# Altium PCB board.PcbDoc
Units mm, origin at the board's own origin, x right, y up, seen from the top; angles counter-clockwise.
Board outline 14 x 33 mm, 4 copper layers (Top, Ground Plane, Power Plane, Bottom), stack 0.651 mm thick; 33 components, 30 nets, 186 pads, 77 vias.
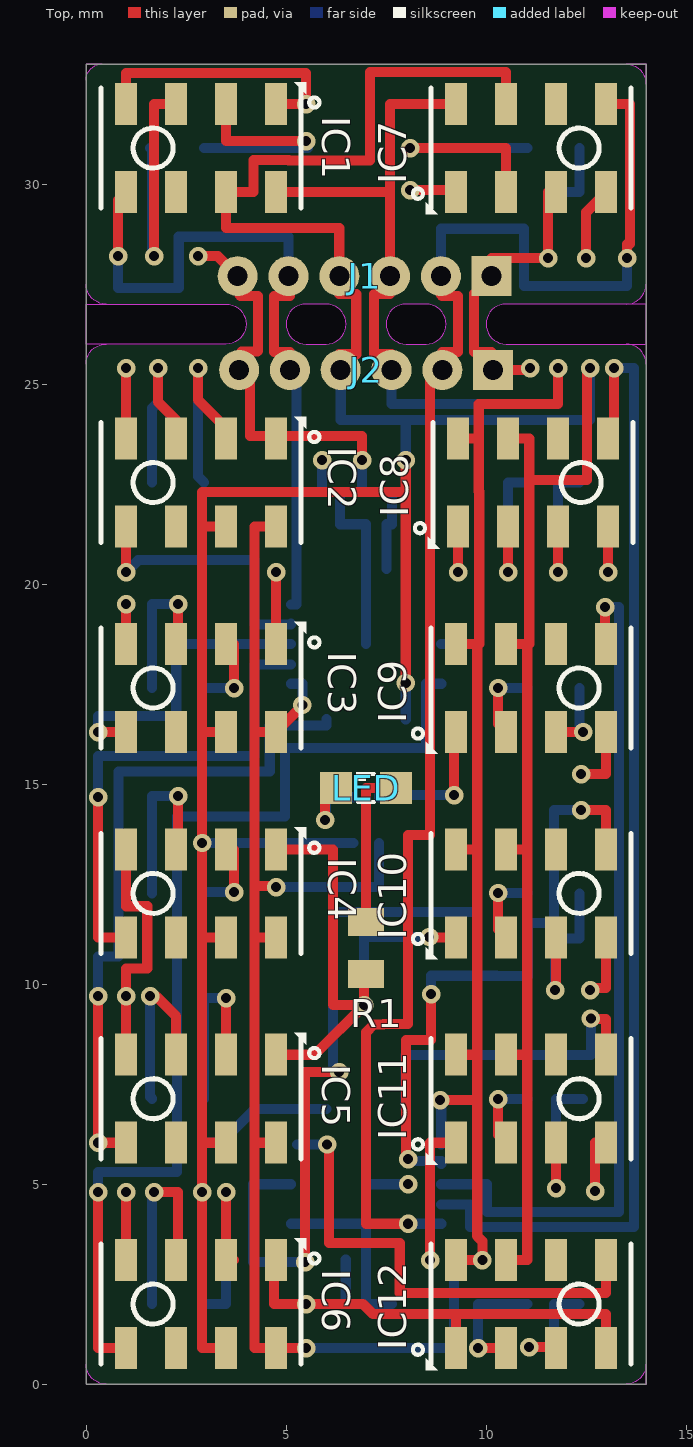
[diagram p0: Top view]
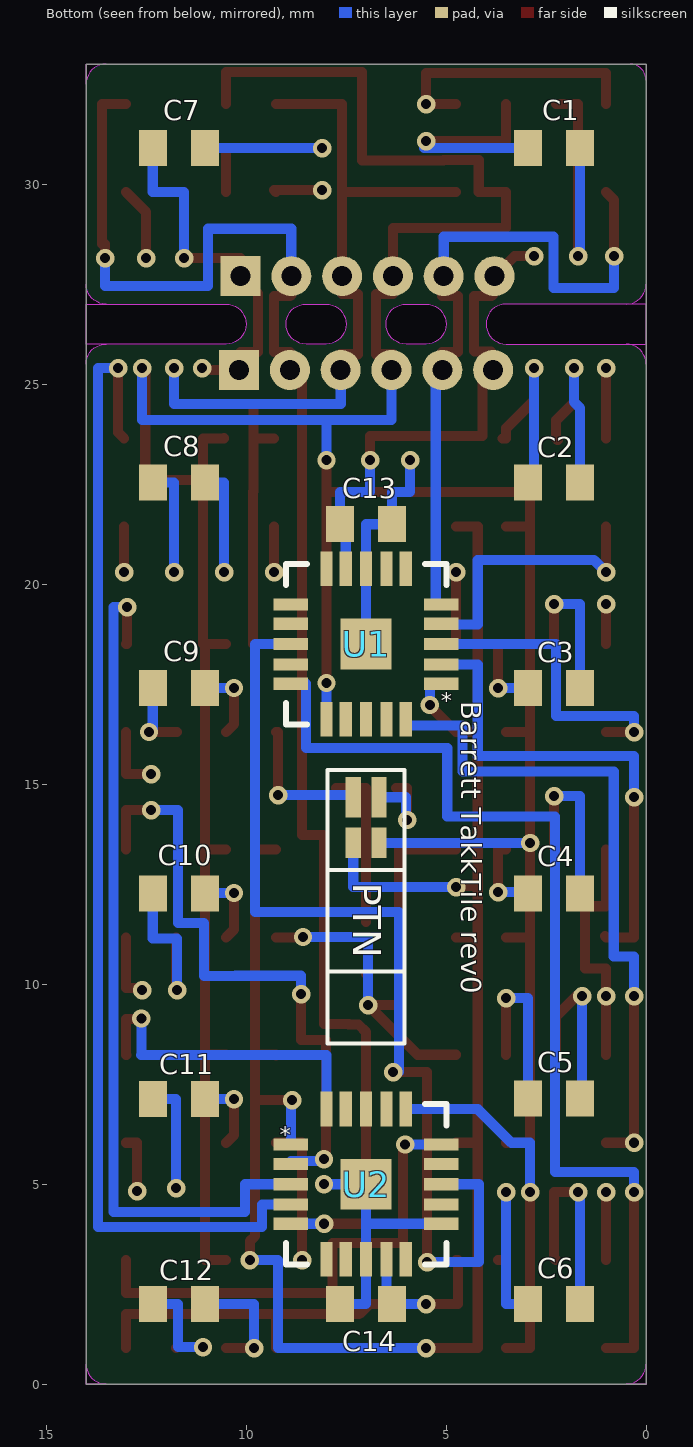
[diagram p1: Bottom view, seen from below]
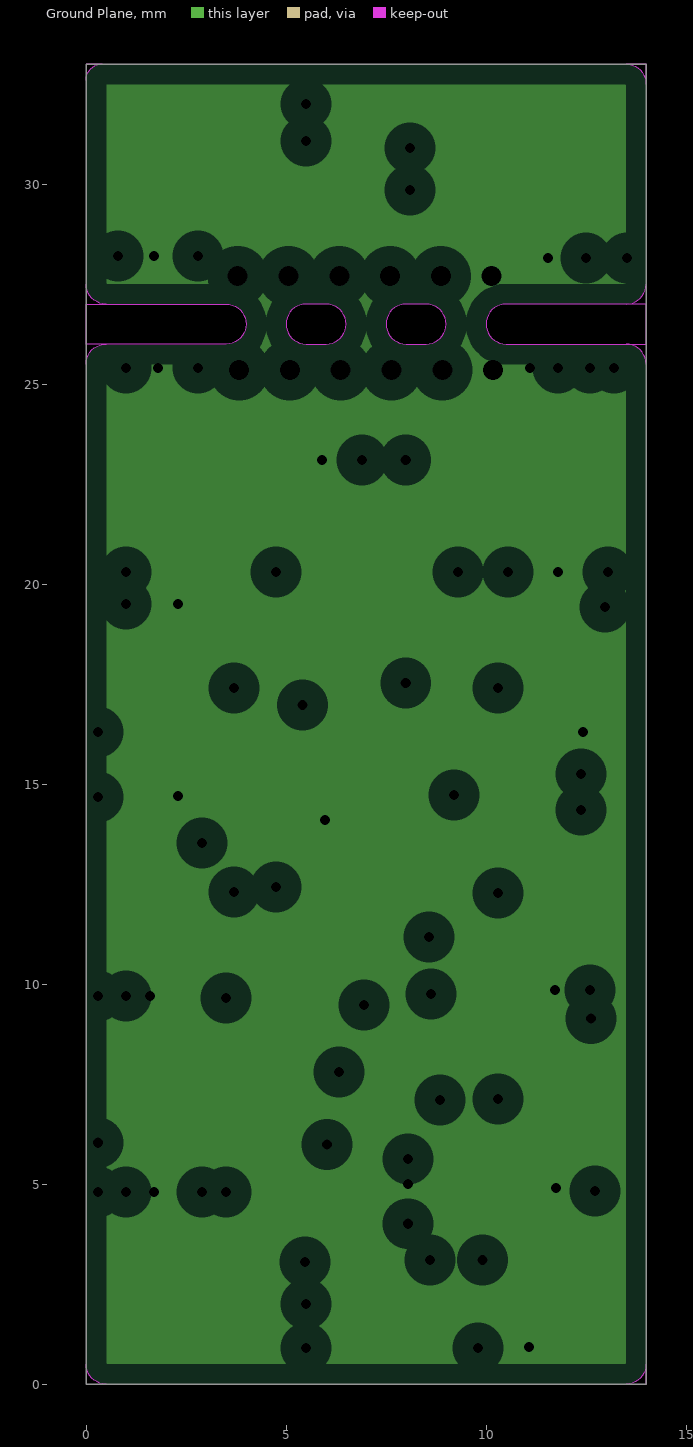
[diagram p2: Ground Plane, clearances drawn from the general rule]
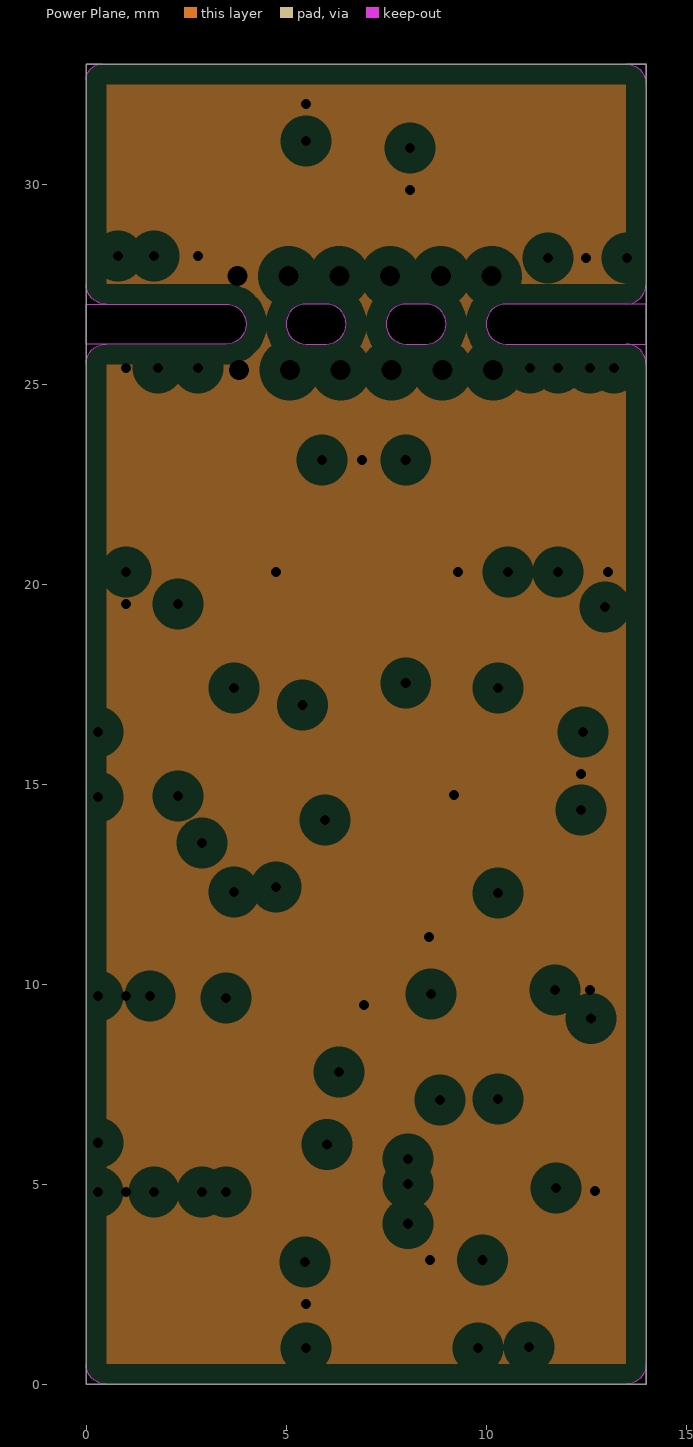
[diagram p3: Power Plane, clearances drawn from the general rule]

## Layer stack, top to bottom
Top Solder: solder mask 0.0102, Solder Resist, Dk 3.5
Top: signal copper 0.0356
Dielectric 1: prepreg 0.127, FR-4, Dk 4.2
Ground Plane: plane copper 0.036, net GND
Dielectric 3: core 0.254, Dk 4.2
Power Plane: plane copper 0.036, net VCC
Dielectric 4: prepreg 0.127, Dk 4.2
Bottom: signal copper 0.0356
Bottom Solder: solder mask 0.0102, Solder Resist, Dk 3.5

## Board outline
0,0 0,33 14,33 14,0
cut-out: 14,27 10.5,27 ccw(c10.5,26.5) 10,26.5 ccw(c10.5,26.5) 10.5,26 14,26
cut-out: 0,27 3.5,27 cw(c3.5,26.5) 4,26.5 cw(c3.5,26.5) 3.5,26 0,26
cut-out: 8,27 ccw(c8,26.5) 7.5,26.5 ccw(c8,26.5) 8,26 8.5,26 ccw(c8.5,26.5) 9,26.5 ccw(c8.5,26.5) 8.5,27
cut-out: 5.5,27 ccw(c5.5,26.5) 5,26.5 ccw(c5.5,26.5) 5.5,26 6,26 ccw(c6,26.5) 6.5,26.5 ccw(c6,26.5) 6,27
cut-out: 0,0 0.5,0 cw(c0.5,0.5) 0,0.5
cut-out: 14,0 14,0.5 cw(c13.5,0.5) 13.5,0
cut-out: 14,25.5 ccw(c13.5,25.5) 13.5,26 14,26
cut-out: 13.5,27 ccw(c13.5,27.5) 14,27.5 14,27
cut-out: 13.5,33 cw(c13.5,32.5) 14,32.5 14,33
cut-out: 0,33 0,32.6 cw(c0.4,32.6) 0.4,33
cut-out: 0,27 0.5,27 cw(c0.5,27.5) 0,27.5
cut-out: 0,25.5 cw(c0.5,25.5) 0.5,26 0,26

## Design rules (kind name [scope] priority, off if disabled: settings)
Clearance 0.127 [All] p1: gap=0.127 except(0: SMDPad-SMDPad SMDPad-THPad SMDPad-Via)
Clearance "Clearance (Same Net)" [All] p2: gap=0 except(0.127: SMDPad-SMDPad SMDPad-THPad; 0.152: SMDPad-Via)
ComponentClearance [All] p1: gap=0.127 collisioncheckmode=3 verticalgap=0.127 showdistances=FALSE
HoleSize [All] p1: absolutevalues=TRUE maxlimit=2.54 minlimit=0.254 maxpercent=80.000 minpercent=20.000
HoleToHoleClearance mdViaViaSameLayer [All] p1: gap=0.203 allowstackedmicrovias=TRUE
HoleToHoleClearance [All] p2: gap=0.254 allowstackedmicrovias=TRUE
MinimumSolderMaskSliver [All] p1: minsoldermaskwidth=0.025
PasteMaskExpansion mlMinCreamFrame [All] p1: expansion=0
PasteMaskExpansion [All] p2: expansion=0
PlaneClearance [All] p1: clearance=0.508
PlaneConnect [All] p1: planeconnectstyle=Direct reliefexpansion=0.508 reliefentries=4 reliefconductorwidth=0.254 reliefairgap=0.254
PolygonConnect ThermalVias [IsVia] p1: connectstyle=Direct reliefconductorwidth=0.254 reliefentries=4 polygonreliefangle="90 Angle" airgapwidth=0.254
PolygonConnect [All] p2: connectstyle=Relief reliefconductorwidth=0.254 reliefentries=4 polygonreliefangle="90 Angle" airgapwidth=0.254
RoutingVias [All] p1: holewidth=0.711 width=1.27 viastyle="Through Hole" minholewidth=0.254 minwidth=0.457 maxholewidth=0.711 maxwidth=1.27
SilkToSilkClearance [All] p1 off: silktosilkclearance=0.254
SilkToSolderMaskClearance [IsPad] p1 off: minsilkscreentomaskgap=0.254 clearancetoexposedcopper=TRUE
SolderMaskExpansion mlMinStopFrame [All] p1: expansion=0.051
SolderMaskExpansion [All] p2: expansion=0.102
Width Width_1 [All] p1: maxlimit=2540 minlimit=0.127 preferedwidth=0.254
Width [All] p2: maxlimit=0.254 minlimit=0.254 preferedwidth=0.254
21 further rules are at their usual default settings.

## Components (designator, comment, footprint, x,y, rotation, side; value= is the part's Value field where it differs from the comment)
C1 "1uF" C0402 2.3,30.9 r180 bottom
C2 "1uF" C0402 2.3,22.539 r180 bottom
C3 "1uF" C0402 2.3,17.404 r180 bottom
C4 "1uF" C0402 2.3,12.269 r180 bottom
C5 "1uF" C0402 2.3,7.135 r180 bottom
C6 "1uF" C0402 2.3,2 r180 bottom
C7 "1uF" C0402 11.683,30.9 r0 bottom
C8 "1uF" C0402 11.683,22.539 r0 bottom
C9 "1uF" C0402 11.683,17.404 r0 bottom
C10 "1uF" C0402 11.683,12.269 r0 bottom
C11 "1uF" C0402NOMECH 11.683,7.127 r0 bottom
C12 "1uF" C0402 11.683,2 r0 bottom
C13 "1uF" C0402 7,21.498 r180 bottom
C14 "1uF" C0402 7,2 r0 bottom
IC1 "MPL115A2" MPL115A2 1.675,30.9 r270 top
IC2 "MPL115A2" MPL115A2 1.675,22.539 r270 top
IC3 "MPL115A2" MPL115A2 1.675,17.404 r270 top
IC4 "MPL115A2" MPL115A2 1.675,12.269 r270 top
IC5 "MPL115A2" MPL115A2 1.675,7.135 r270 top
IC6 "MPL115A2" MPL115A2 1.675,2 r270 top
IC7 "MPL115A2" MPL115A2 12.325,30.9 r90 top
IC8 "MPL115A2" MPL115A2 12.375,22.539 r90 top
IC9 "MPL115A2" MPL115A2 12.325,17.404 r90 top
IC10 "MPL115A2" MPL115A2 12.325,12.269 r90 top
IC11 "MPL115A2" MPL115A2 12.325,7.135 r90 top
IC12 "MPL115A2" MPL115A2 12.325,2 r90 top
J1 "CON6THR127" CON6THR127NOSILK 6.965,27.7 r0 top
J2 "CON6THR127" CON6THR127NOSILK 7,25.354 r0 top
LED "LEDSML0603" SML0603 7,14.9 r0 top
PTN "PTN4H" PTN4H 7,14.1 r180 bottom
R1 "120R" R0402 7,10.9 r270 top
U1 "ATTINY24A-MU-QFN20" QFN50P400X400X80-21N 7,18.5 r0 bottom
U2 "ATTINY24A-MU-QFN20" QFN50P400X400X80-21N 7,4.998 r180 bottom

## Footprints (in the part's own frame and the unit in brackets; to place one, negate y for a bottom-side part, rotate by r counter-clockwise, add the part's x,y. Pads: shape width x height; smd on the part's side, far side on the other; paste and mask are expansions set on the pad)
C0402 [mm] "C0402"
  rect 0.7x0.9 smd: 1(-0.65,0) 2(0.65,0)
C0402NOMECH [mm] "C0402"
  rect 0.7x0.9 smd: 1(-0.65,0) 2(0.65,0)
CON6THR127NOSILK [mm] "Connector, Through Hole, 1.27mm"
  round 1 hole 0.5: 1(-3.175,0) 2(-1.905,0) 3(-0.635,0) 4(0.635,0) 5(1.905,0)
  rect 1x1 hole 0.5: 6(3.175,0)
MPL115A2 [mm] "MPL115A2"
  rect 1.05x0.55 smd: 1(-1.1,3.075) 2(-1.1,1.825) 3(-1.1,0.575) 4(-1.1,-0.675) 5(1.1,-0.675) 6(1.1,0.575) 7(1.1,1.825) 8(1.1,3.075)
  silkscreen extent -1.65,-1.3 1.5,4.16
PTN4H [mm]
  rect 0.38x1.02 smd: 0(-0.32,0.57) 1(0.32,0.57)
  rect 0.38x0.76 smd: 2(-0.32,-0.57) 3(0.32,-0.57)
  silkscreen extent -0.96,-5.58 0.96,1.25
QFN50P400X400X80-21N [mil] "QFN50P400X400X80-21N"
  rect 34x12 smd: 1(-74,39) 2(-74,20) 3(-74,0) 4(-74,-20) 5(-74,-39) 11(74,-39) 12(74,-20) 13(74,0) 14(74,20) 15(74,39)
  rect 12x34 smd: 6(-39,-74) 7(-20,-74) 8(0,-74) 9(20,-74) 10(39,-74) 16(39,74) 17(20,74) 18(0,74) 19(-20,74) 20(-39,74)
  rect 50x50 smd: 21(0,0)
  silkscreen extent -79,-79 79,79
R0402 [mm] "R0402"
  rect 0.7x0.9 smd: 1(-0.65,0) 2(0.65,0)
SML0603 [mil] "SML0603"
  rect 31.5x31.5 smd: A(29.53,0) C(-29.53,0)
  silkscreen extent -10,-14 8,16

## Part data
C1 C2 C3 C4 C5 C6 C7 C8 C9 C10 C11 C12 C13 C14: library part C-EUC0402, "CAPACITOR, European symbol"
LED: "LED   OSRAM: - CHIPLED LG R971, LG N971, LY N971, LG Q971, LY Q971, LO R971, LY R971 LH N974, LH R974 LS Q976, LO Q976, LY Q976 LO Q996 - Hyper CHIPLED LW Q18S LB Q993, LB Q99A, LB R99A - SideLED LS A670, LO A670, LY A670, LG A670, LP A670 LB A673, LV A673, LT A673, LW A673 LH A674 LY A675 LS A676, LA A676, LO A676, LY A676, LW A676 LS A679, LY A679, LG A679 -  Hyper Micro SIDELED® LS Y876, LA Y876, LO Y876, LY Y876 LT Y87S - SmartLED LW L88C, LW L88S LB L89C, LB L89S, LG L890 LS L89K, LO L89K, LY L89K LS L896, LA L896, LO L896, LY L896 - TOPLED LS T670, LO T670, LY T670, LG T670, LP T670 LSG T670, LSP T670, LSY T670, LOP T670, LYG T670 LG T671, LOG T671, LSG T671 LB T673, LV T673, LT T673, LW T673 LH T674 LS T676, LA T676, LO T676, LY T676, LB T676, LH T676, LSB T676, LW T676 LB T67C, LV T67C, LT T67C, LS T67K, LO T67K, LY T67K, LW E67C LS E67B, LA E67B, LO E67B, LY E67B, LB E67C, LV E67C, LT E67C LW T67C LS T679, LY T679, LG T679 LS T770, LO T770, LY T770, LG T770, LP T770 LB T773, LV T773, LT T773, LW T773 LH T774 LS E675, LA E675, LY E675, LS T675 LS T776, LA T776, LO T776, LY T776, LB T776 LHGB T686 LT T68C, LB T68C - Hyper Mini TOPLED® LB M676 - Mini TOPLED Santana® LG M470 LS M47K, LO M47K, LY M47K    Source: http://www.osram.convergy.de   LUXEON: - LUMILED® LXK2-PW12-R00, LXK2-PW12-S00, LXK2-PW14-U00, LXK2-PW14-V00 LXK2-PM12-R00, LXK2-PM12-S00, LXK2-PM14-U00 LXK2-PE12-Q00, LXK2-PE12-R00, LXK2-PE12-S00, LXK2-PE14-T00, LXK2-PE14-U00 LXK2-PB12-K00, LXK2-PB12-L00, LXK2-PB12-M00, LXK2-PB14-N00, LXK2-PB14-P00, LXK2-PB14-Q00 LXK2-PR12-L00, LXK2-PR12-M00, LXK2-PR14-Q00, LXK2-PR14-R00 LXK2-PD12-Q00, LXK2-PD12-R00, LXK2-PD12-S00 LXK2-PH12-R00, LXK2-PH12-S00 LXK2-PL12-P00, LXK2-PL12-Q00, LXK2-PL12-R00    Source: www.luxeon.com   KINGBRIGHT:   KA-3528ASYC Source: www.kingbright.com"
PTN: "Omnetics PTN Connector 4 pins, Horizontal"
R1: library part R-US_R0402, "RESISTOR, American symbol"
U1 U2: library part ATTINY24A-MU, "Microcontroller"

## Via types
v1: diameter 0.457, hole 0.254, Top to Bottom, 77 vias

## Nets (pads, with @x,y where several pads share a name; then routed paths per layer and width w, separated by ;. In a path a pad name is that pad's centre, name@x,y a point inside that pad or via, vN(x,y) a via of type N, cw(c..) or ccw(c..) an arc to the next point about the centre after c; other vN are vias at no path point)
GND: C1.2 C2.2 C3.2 C4.2 C5.2 C6.2 C7.2 C8.2 C9.2 C10.2 C11.2 C12.2 C13.2 C14.2 IC1.3 IC2.3 IC3.3 IC4.3 IC5.3 IC6.3 IC7.3 IC8.3 IC9.3 IC10.3 IC11.3 IC12.3 J1.6 J2.6 LED.C PTN.1 U1.8 U1.21 U2.8 U2.11 U2.21 | length 73
  Top w0.254: v1(1.6,9.7) 1.75,9.7 2.25,9.2 IC5.3 ; v1(1.7,4.8) 2.3,4.8 2.3,3.15 IC6.3 ; v1(1.7,28.2) 1.7,32 IC1.3 ; v1(1.8,25.4) 1.8,24.55 2.25,24.1 IC2.3 IC2.3@2.211,23.6 ; IC4.3 2.3,13.419 v1(2.3,14.7) ; IC3.3 2.3,18.554 v1(2.3,19.5) ; v1(5.975,14.101) 5.975,14.9 LED.C ; v1(11.076,0.925) 11.725,0.925 IC12.3 ; v1(11.1,25.4) 11.1,25.354 J2.6 10.167,25.362 10.167,25.767 10.134,25.8 9.7,25.8 9.7,27.26 J1.6 10.14,28.15 v1(11.55,28.15) 11.55,29.8 IC7.3 ; v1(11.725,9.85) 11.75,9.85 IC10.3 ; IC9.3@11.725,16.304 IC9.3 12.422,16.304 v1(12.426,16.301) ; v1(11.75,4.9) IC11.3 ; v1(11.8,20.3) IC8.3 11.8,21.475 IC8.3@11.801,21.476
  Bottom w0.254: v1(1.6,9.7) 1.6,7.185 C5.2 ; C1.2@1.6,30.9 C1.2 1.65,28.2 v1(1.7,28.2) ; C6.2 1.65,4.8 v1(1.7,4.8) ; C4.2 1.65,14.7 v1(2.3,14.7) ; C3.2 1.65,19.5 v1(2.3,19.5) ; C2.2 1.65,24.4 1.8,24.55 v1(1.8,25.4) ; U2.11 7,4.007 ; v1(5.9,23.1) 5.9,22.3 6.35,22.3 C13.2 7,21.498 U1.8 7,19.44 ; v1@5.976,14.101 6,14.125 6,14.67 PTN.1 ; U1.21 7,19.44 ; 7,19.5 7,19.44 ; C14.2 7,2 U2.8 7,4.007 ; v1@8.1,5 8.098,4.998 U2.21 7,4.007 ; v1(11.076,0.925) 11.7,0.925 11.7,2 C12.2 ; v1(11.55,28.15) 11.55,29.8 12.333,29.8 C7.2 ; v1(11.725,9.85) 11.725,11.144 12.333,11.144 C10.2 ; v1(11.75,4.9) 11.75,7.127 C11.2 C11.2@12.426,7.127 ; v1(11.8,20.3) 11.8,22.539 C8.2 ; C9.2 12.333,16.301 v1(12.426,16.301)
  other v1: 8.05,5
NetC1_1: C1.1 IC1.2 | length 5.8
  Top w0.254: IC1.2 3.5,31.075 v1(5.5,31.075) v1@5.55,31.075
  Bottom w0.254: C1.1 5.55,30.9 v1@5.55,31.075
NetC2_1: C2.1 IC2.2 | length 5.1
  Top w0.254: v1(2.8,25.4) 2.8,24.6 3.5,23.9 IC2.2 IC2.2@3.586,23.639
  Bottom w0.254: v1(2.8,25.4) 2.8,22.689 C2.1
NetC3_1: C3.1 IC3.2 | length 2.1
  Top w0.254: IC3.2 3.7,18.504 v1(3.7,17.4)
  Bottom w0.254: C3.1 2.954,17.4 v1(3.7,17.4)
NetC4_1: C4.1 IC4.2 | length 2
  Top w0.254: IC4.2 3.7,13.369 v1(3.7,12.3)
  Bottom w0.254: C4.1 2.981,12.3 v1(3.7,12.3)
NetC5_1: C5.1 IC5.2 | length 4.5
  Top w0.254: IC5.2 v1(3.5,9.65)
  Bottom w0.254: C5.1 2.95,9.65 v1(3.5,9.65)
NetC6_1: C6.1 IC6.2 | length 5.2
  Top w0.254: v1(3.5,4.8) IC6.2 IC6.2@3.7,3.1
  Bottom w0.254: C6.1 3.5,2 v1(3.5,4.8)
NetC7_1: C7.1 IC7.2 | length 6.4
  Top w0.254: v1(8.1,30.9) 10.5,30.9 IC7.2
  Bottom w0.254: v1(8.1,30.9) C7.1
NetC8_1: C8.1 IC8.2 | length 3.9
  Top w0.254: v1(10.55,20.3) IC8.2
  Bottom w0.254: v1(10.55,20.3) 10.55,22.539 C8.1
NetC9_1: C9.1 IC9.2 | length 1.9
  Top w0.254: v1(10.301,17.401) 10.301,16.503 IC9.2
  Bottom w0.254: v1(10.301,17.401) 10.301,17.404 C9.1
NetC10_1: C10.1 IC10.2 | length 1.9
  Top w0.254: v1(10.301,12.276) 10.301,11.369 IC10.2
  Bottom w0.254: v1(10.301,12.276) 11.033,12.276 C10.1
NetC11_1: C11.1 IC11.2 | length 1.9
  Top w0.254: v1(10.301,7.125) 10.301,6.234 IC11.2
  Bottom w0.254: v1(10.301,7.125) 10.301,7.127 C11.1
NetC12_1: C12.1 IC12.2 | length 3
  Top w0.254: v1(9.8,0.9) IC12.2
  Bottom w0.254: v1(9.8,0.9) 9.8,2 C12.1
NetLED_A: LED.A R1.1 | length 4.1
  Top w0.254: R1.1 7,14.9 LED.A
RESET: U1.13 U2.13 | length 25.1
  Top w0.254: v1(5.475,3.05) 5.475,7.8 v1(6.325,7.8)
  Bottom w0.254: U2.13 4.177,4.998 4.177,3.05 v1(5.475,3.05) ; v1(6.325,7.8) 6.175,7.8 6.175,11.8 9.775,11.8 9.775,18.5 U1.13
RST01: IC1.5 J1.2 J2.2 U1.5 | length 18.3
  Top w0.254: v1(0.8,28.2) 0.8,29.6 IC1.5 ; J1.2 5.1,27.2 4.7,27.2 4.7,25.8 5.1,25.8 5.095,25.746 J2.2
  Bottom w0.254: v1(0.8,28.2) 0.8,27.4 2.317,27.4 2.317,28.683 5.06,28.683 J1.2 ; J2.2 5.258,25.354 5.258,19.491 U1.5
RST01_2: IC7.5 J1.5 J2.5 U2.5 | length 40.7
  Top w0.254: v1(8.05,4.007) 7,4.007 7,8.8 7.192,8.992 7.433,8.992 7.433,9 8.05,9 8.05,13.725 8.6,13.725 8.6,25.354 J2.5 8.905,25.795 9.195,25.795 9.2,25.8 9.3,25.8 9.3,27.2 8.9,27.2 8.87,27.23 J1.5 ; IC7.5 13.6,32 13.6,28.5 13.525,28.5 v1(13.525,28.15) v1@13.525,28.075
  Bottom w0.254: v1(8.05,4.007) U2.5 ; J1.5 8.87,28.883 10.95,28.883 10.95,27.45 13.524,27.45 v1@13.524,28.075
RST02: IC2.5 U1.4 | length 7
  Top w0.254: v1(1,20.3) IC2.5
  Bottom w0.254: v1(1,20.3) 1.3,20.6 4.208,20.6 4.208,18.992 5.12,18.992 U1.4
RST02_2: IC8.5 U2.4 | length 29.2
  Top w0.254: IC8.5 13.2,23.789 v1(13.2,25.4)
  Bottom w0.254: U2.4 9.6,4.49 9.6,3.925 13.7,3.925 13.7,25.4 v1(13.2,25.4)
RST03: IC3.5 U1.3 | length 7.7
  Top w0.254: v1(0.3,16.3) 0.996,16.3 IC3.5
  Bottom w0.254: v1(0.3,16.3) 0.3,16.7 2.254,16.7 2.254,18.5 U1.3
RST03_2: IC9.5 U2.3 | length 21.5
  Top w0.254: v1(12.975,19.425) 12.975,18.504 IC9.5
  Bottom w0.254: U2.3 10.025,4.998 10.025,4.306 13.319,4.306 13.319,19.425 v1(12.975,19.425)
RST04: IC4.5 U1.2 | length 12.5
  Top w0.254: v1(0.3,14.675) 0.3,11.169 IC4.5 IC4.5@1.031,11.2
  Bottom w0.254: v1@0.3,14.6 v1(0.3,14.675) 0.3,15.7 4.208,15.7 4.208,17.992 U1.2
RST04_2: IC10.5 U2.2 | length 15.7
  Top w0.254: v1(8.05,5.625) 8,5.676 8,8.6 8.625,8.6 v1(8.625,9.75) ; v1(12.375,14.35) 13,14.35 IC10.5
  Bottom w0.254: v1(8.05,5.625) 8.119,5.625 8.119,5.582 8.88,5.582 U2.2 ; v1(8.625,9.75) 8.625,10.208 10.262,10.208 10.262,10.2 11.05,10.2 11.05,11.525 11.7,11.525 11.7,14.35 v1(12.375,14.35)
RST05: IC5.5 U1.20 | length 17
  Top w0.254: v1(0.3,9.7) v1(0.3,6.035) IC5.5
  Bottom w0.254: v1(0.3,9.7) 0.3,10.692 0.808,10.692 0.808,15.319 4.589,15.319 4.589,16.468 6.009,16.468 U1.20
RST05_2: IC11.5 U2.20 | length 8.2
  Top w0.254: v1(12.619,9.141) 12.619,9.131 12.625,9.125 13,9.125 IC11.5 IC11.5@12.99,8.225
  Bottom w0.254: U2.20 7.991,8.225 12.619,8.225 ; v1(12.619,9.141) 12.619,8.225 ; 12.625,8.225 12.619,8.225
RST06: IC6.5 U1.15 | length 25.9
  Top w0.254: v1(0.3,4.8) 0.3,0.9 IC6.5
  Bottom w0.254: v1(0.3,4.8) 0.3,5.3 2.275,5.3 2.275,14.192 4.97,14.192 4.97,15.9 8.5,15.9 8.5,17.509 U1.15
RST06_2: IC12.5 U2.15 | length 12.3
  Top w0.254: v1(6.025,5.989) 6.075,5.989 6.075,3.525 7.843,3.525 7.843,2.275 13,2.275 IC12.5
  Bottom w0.254: U2.15@5.279,5.989 v1(6.025,5.989)
SCL: IC1.8 IC2.8 IC3.8 IC4.8 IC5.8 IC6.8 IC7.8 IC8.8 IC9.8 IC10.8 IC11.8 IC12.8 J1.4 J2.4 PTN.2 U1.1 U2.1 | length 83.3
  Top w0.254: IC5.8 4.208,6.035 ; IC4.8 4.208,11.169 ; v1(4.75,12.425) 4.75,12.45 4.208,12.45 ; IC2.8 4.208,21.439 4.208,16.304 ; IC1.8 7.6,29.8 ; v1(5.406,16.976) 5.406,16.96 IC3.8 4.208,16.304 ; v1(5.5,0.9) IC6.8 4.208,0.9 4.208,6.035 ; J1.4@7.6,27.254 7.2,27.254 7.2,25.746 7.635,25.746 J2.4 ; J1.4 7.6,29.8 ; v1(8.85,7.1) 9.779,7.1 ; IC12.8 v1(9.906,3.1) 9.906,3.573 9.779,3.7 9.779,7.1 ; IC11.8@9.25,8.219 IC11.8 9.779,8.235 ; IC10.8 9.779,13.369 ; IC9.8 9.779,18.504 ; IC7.8 7.6,32 7.6,29.8 ; IC8.8 9.817,23.639 ; v1(11.8,25.4) 11.8,24.5 9.817,24.5 9.817,23.639 ; 4.208,6.035 4.208,11.169 ; 4.208,11.169 4.208,12.45 ; 4.208,12.45 4.208,16.304 ; 9.779,7.1 9.779,8.235 ; 9.779,8.235 9.779,13.369 ; 9.779,13.369 9.779,18.504 ; 9.779,18.504 9.829,18.504 9.829,22.317 9.817,22.317 9.817,23.639
  Bottom w0.254: v1(4.75,12.425) 7.32,12.425 PTN.2 ; U1.1 5.406,17.509 v1(5.406,16.976) ; v1(5.5,0.9) 9.2,0.9 9.2,3.1 v1(9.906,3.1) ; J2.4 7.635,24.5 11.8,24.5 v1(11.8,25.4) ; v1(8.85,7.1) 8.88,7.1 U2.1
SDA: IC1.7 IC2.7 IC3.7 IC4.7 IC5.7 IC6.7 IC7.7 IC8.7 IC9.7 IC10.7 IC11.7 IC12.7 J1.3 J2.3 PTN.3 U1.16 U2.16 | length 100.8
  Top w0.254: IC6.7 2.9,0.9 v1(2.9,4.8) 2.9,6.035 ; IC5.7 2.9,6.035 ; IC4.7 2.9,11.169 ; IC3.7 2.9,16.304 ; IC2.7 2.9,21.439 ; J2.3@6.4,25.354 J2.3 6.33,25.354 6.33,25.746 6.754,25.746 6.754,27.254 6.33,27.254 J1.3 6.33,28.9 3.5,28.9 IC1.7 4.183,29.8 4.183,30.6 5.067,30.6 5.067,30.592 7.1,30.592 7.1,32.8 10.5,32.8 IC7.7 ; v1(7.991,17.527) 7.991,22.3 ; v1(7.991,23.1) 7.991,22.3 ; IC12.7 11.029,3.1 11.029,8.235 ; IC11.7 11.029,8.235 ; IC10.7 11.029,13.369 ; IC9.7 11.029,18.504 ; IC8.7@10.55,23.65 IC8.7 11.079,23.639 11.079,22.6 ; v1(12.6,25.4) 12.521,25.4 12.521,22.6 11.079,22.6 ; 2.9,6.035 2.9,11.169 ; 2.9,11.169 v1(2.9,13.53) 2.9,16.304 ; 2.9,16.304 2.9,21.439 ; 2.9,21.439 2.9,22.3 7.991,22.3 ; 11.029,8.235 11.029,13.369 ; 11.029,13.369 11.029,18.504 ; 11.029,18.504 11.079,18.504 11.079,22.6
  Bottom w0.254: v1(2.9,4.8) 2.9,6.035 3.368,6.035 4.208,6.875 4.7,6.875 4.7,6.878 U2.16 ; v1(2.9,13.53) PTN.3 ; J2.3 6.365,24.1 7.991,24.1 ; U1.16 v1(7.991,17.527) ; v1(7.991,23.1) 7.991,24.1 ; v1(12.6,25.4) 12.6,24.1 7.991,24.1
VCC: C13.1 C14.1 IC1.1 IC1.4 IC2.1 IC2.4 IC3.1 IC3.4 IC4.1 IC4.4 IC5.1 IC5.4 IC6.1 IC6.4 IC7.1 IC7.4 IC8.1 IC8.4 IC9.1 IC9.4 IC10.1 IC10.4 IC11.1 IC11.4 IC12.1 IC12.4 J1.1 J2.1 PTN.0 R1.2 U1.9 U2.9 | length 76.7
  Top w0.254: IC6.4 v1(1,4.8) ; IC5.4 v1(1,9.7) 1,10.39 1.529,10.39 1.529,11.948 1,11.948 IC4.4 ; IC3.4 v1(1,19.5) ; IC2.4 v1(1,25.4) ; IC1.4 1,32.779 5.5,32.779 v1(5.5,32) IC1.1 ; v1(2.8,28.2) 3.29,28.2 J1.1 ; J1.1@3.833,27.233 3.866,27.2 4.3,27.2 4.3,25.834 4.283,25.817 3.883,25.817 J2.1 4.094,25.354 4.094,23.7 6.9,23.7 v1(6.9,23.1) ; IC6.1 4.7,3.1 4.7,2 5.825,2 6.925,2 7.175,1.75 9.25,1.75 ; IC5.1 5.71,8.235 v1(6.95,9.475) ; IC4.1 6.175,13.369 6.175,9.475 v1(6.95,9.475) ; IC3.1 v1(4.75,20.3) ; R1.2 6.95,10.25 v1(6.95,9.475) ; v1@8.2,29.85 9.3,29.85 IC7.1 ; v1(8.575,11.176) 8.556,11.176 8.55,11.169 IC10.1 ; v1(8.6,3.1) 8.6,6.035 IC11.1 ; v1(9.2,14.725) 9.2,16.304 IC9.1 ; IC12.1 9.25,1.75 ; v1(9.3,20.3) IC8.1 ; v1(12.375,15.25) 13,15.25 IC9.4 ; v1@12.5,28.125 12.5,29.3 IC7.4 ; v1@12.6,9.9 13,9.9 IC10.4 ; v1(12.725,4.825) 12.725,6.035 IC11.4 ; IC12.4 13,1.75 9.25,1.75 ; v1(13.05,20.3) IC8.4
  Bottom w0.254: v1@1,19.4 v1(1,19.5) ; v1(5.5,2) 6.375,2 6.492,2 U2.9 ; v1(6.9,23.1) 6.9,22.3 7.65,22.3 C13.1 7.508,21.498 U1.9 ; v1(6.95,9.475) 6.95,11.176 v1@8.675,11.176 ; PTN.0 7.32,14.725 v1(9.2,14.725)
  other v1: 12.6,9.85 12.5,28.15 8.1,29.85
pads on no net: IC1.6 IC2.6 IC3.6 IC4.6 IC5.6 IC6.6 IC7.6 IC8.6 IC9.6 IC10.6 IC11.6 IC12.6 U1.6 U1.7 U1.10 U1.11 U1.12 U1.14 U1.17 U1.18 U1.19 U2.6 U2.7 U2.10 U2.12 U2.14 U2.17 U2.18 U2.19

## Polygon pours and split planes (outlines as drawn)
GND on Ground Plane (split plane): 13.485,32.485 13.49,32.473 13.49,27.527 13.485,27.515 13.473,27.51 10.401,27.51 10.301,27.501 10.205,27.472 10.021,27.395 9.933,27.348 9.856,27.285 9.715,27.144 9.652,27.067 9.626,27.02 9.605,26.979 9.528,26.795 9.517,26.757 9.5,26.701 9.472,26.795 9.395,26.979 9.348,27.067 9.285,27.144 9.144,27.285 9.067,27.348 8.979,27.395 8.795,27.472 8.699,27.501 8.599,27.51 7.901,27.51 7.801,27.501 7.705,27.472 7.521,27.395 7.433,27.348 7.356,27.285 7.215,27.144 7.152,27.067 7.126,27.02 7.105,26.979 7.028,26.795 7.017,26.757 7,26.701 6.972,26.795 6.895,26.979 6.848,27.067 6.785,27.144 6.644,27.285 6.567,27.348 6.479,27.395 6.295,27.472 6.199,27.501 6.099,27.51 5.401,27.51 5.301,27.501 5.205,27.472 5.021,27.395 4.933,27.348 4.856,27.285 4.715,27.144 4.652,27.067 4.626,27.02 4.605,26.979 4.528,26.795 4.517,26.757 4.5,26.701 4.472,26.795 4.395,26.979 4.348,27.067 4.285,27.144 4.144,27.285 4.067,27.348 3.979,27.395 3.795,27.472 3.699,27.501 3.599,27.51 0.527,27.51 0.515,27.515 0.51,27.527 0.51,32.49 13.473,32.49
GND on Ground Plane (split plane): 9.517,26.243 9.528,26.205 9.605,26.021 9.626,25.98 9.652,25.933 9.715,25.856 9.856,25.715 9.933,25.652 10.021,25.605 10.205,25.528 10.243,25.517 10.301,25.499 10.401,25.49 13.473,25.49 13.485,25.485 13.49,25.473 13.49,0.527 13.485,0.515 13.473,0.51 0.527,0.51 0.515,0.515 0.51,0.527 0.51,25.473 0.515,25.485 0.527,25.49 3.599,25.49 3.699,25.499 3.757,25.517 3.795,25.528 3.979,25.605 4.02,25.626 4.067,25.652 4.144,25.715 4.285,25.856 4.348,25.933 4.395,26.021 4.472,26.205 4.5,26.299 4.517,26.243 4.528,26.205 4.605,26.021 4.626,25.98 4.652,25.933 4.715,25.856 4.856,25.715 4.933,25.652 5.021,25.605 5.205,25.528 5.243,25.517 5.301,25.499 5.401,25.49 6.099,25.49 6.199,25.499 6.257,25.517 6.295,25.528 6.479,25.605 6.52,25.626 6.567,25.652 6.644,25.715 6.785,25.856 6.848,25.933 6.895,26.021 6.972,26.205 7,26.299 7.017,26.243 7.028,26.205 7.105,26.021 7.126,25.98 7.152,25.933 7.215,25.856 7.356,25.715 7.433,25.652 7.521,25.605 7.705,25.528 7.743,25.517 7.801,25.499 7.901,25.49 8.599,25.49 8.699,25.499 8.757,25.517 8.795,25.528 8.979,25.605 9.02,25.626 9.067,25.652 9.144,25.715 9.285,25.856 9.348,25.933 9.395,26.021 9.472,26.205 9.5,26.299
VCC on Power Plane (split plane): 13.485,32.485 13.49,32.473 13.49,27.527 13.485,27.515 13.473,27.51 10.401,27.51 10.301,27.501 10.205,27.472 10.021,27.395 9.933,27.348 9.856,27.285 9.715,27.144 9.652,27.067 9.626,27.02 9.605,26.979 9.528,26.795 9.517,26.757 9.5,26.701 9.472,26.795 9.395,26.979 9.348,27.067 9.285,27.144 9.144,27.285 9.067,27.348 8.979,27.395 8.795,27.472 8.699,27.501 8.599,27.51 7.901,27.51 7.801,27.501 7.705,27.472 7.521,27.395 7.433,27.348 7.356,27.285 7.215,27.144 7.152,27.067 7.126,27.02 7.105,26.979 7.028,26.795 7.017,26.757 7,26.701 6.972,26.795 6.895,26.979 6.848,27.067 6.785,27.144 6.644,27.285 6.567,27.348 6.479,27.395 6.295,27.472 6.199,27.501 6.099,27.51 5.401,27.51 5.301,27.501 5.205,27.472 5.021,27.395 4.933,27.348 4.856,27.285 4.715,27.144 4.652,27.067 4.626,27.02 4.605,26.979 4.528,26.795 4.517,26.757 4.5,26.701 4.472,26.795 4.395,26.979 4.348,27.067 4.285,27.144 4.144,27.285 4.067,27.348 3.979,27.395 3.795,27.472 3.699,27.501 3.599,27.51 0.527,27.51 0.515,27.515 0.51,27.527 0.51,32.49 13.473,32.49
VCC on Power Plane (split plane): 9.517,26.243 9.528,26.205 9.605,26.021 9.626,25.98 9.652,25.933 9.715,25.856 9.856,25.715 9.933,25.652 10.021,25.605 10.205,25.528 10.243,25.517 10.301,25.499 10.401,25.49 13.473,25.49 13.485,25.485 13.49,25.473 13.49,0.527 13.485,0.515 13.473,0.51 0.527,0.51 0.515,0.515 0.51,0.527 0.51,25.473 0.515,25.485 0.527,25.49 3.599,25.49 3.699,25.499 3.757,25.517 3.795,25.528 3.979,25.605 4.02,25.626 4.067,25.652 4.144,25.715 4.285,25.856 4.348,25.933 4.395,26.021 4.472,26.205 4.5,26.299 4.517,26.243 4.528,26.205 4.605,26.021 4.626,25.98 4.652,25.933 4.715,25.856 4.856,25.715 4.933,25.652 5.021,25.605 5.205,25.528 5.243,25.517 5.301,25.499 5.401,25.49 6.099,25.49 6.199,25.499 6.257,25.517 6.295,25.528 6.479,25.605 6.52,25.626 6.567,25.652 6.644,25.715 6.785,25.856 6.848,25.933 6.895,26.021 6.972,26.205 7,26.299 7.017,26.243 7.028,26.205 7.105,26.021 7.126,25.98 7.152,25.933 7.215,25.856 7.356,25.715 7.433,25.652 7.521,25.605 7.705,25.528 7.743,25.517 7.801,25.499 7.901,25.49 8.599,25.49 8.699,25.499 8.757,25.517 8.795,25.528 8.979,25.605 9.02,25.626 9.067,25.652 9.144,25.715 9.285,25.856 9.348,25.933 9.395,26.021 9.472,26.205 9.5,26.299

## Silkscreen, mask and mechanical layers (free items; w line width, h text height)
Bottom Overlay:
  text "Barrett TakkTile rev0" at 4.625,17.075 h0.5 r90
FabNotes:
  text "Fabrication Notes: / 1. Board should be 0.062\" thick / 2. Purple Solder mask on top and bottom / 3. White silk screen on top and bottom / 4. HASL finish / 5. Board dimensions are 14mm x 33mm" at 22.175,23.05 h0.7

## Text inside footprints (layer, text, board x,y; h text height)
U1: Bottom Overlay "*" at 4.841,17.611 h0.7 r180
U2: Bottom Overlay "*" at 9.159,5.887 h0.7; FabNotes "*" at 10.505,5.989 h0.7